# Altium PCB Sensor_Board_PCB.PcbDoc
Units mil, origin at the board's own origin, x right, y up, seen from the top; angles counter-clockwise.
Board outline 1655 x 2110 mil, 2 copper layers (Top Layer, Bottom Layer); 25 components, 22 nets, 124 pads, 20 vias.
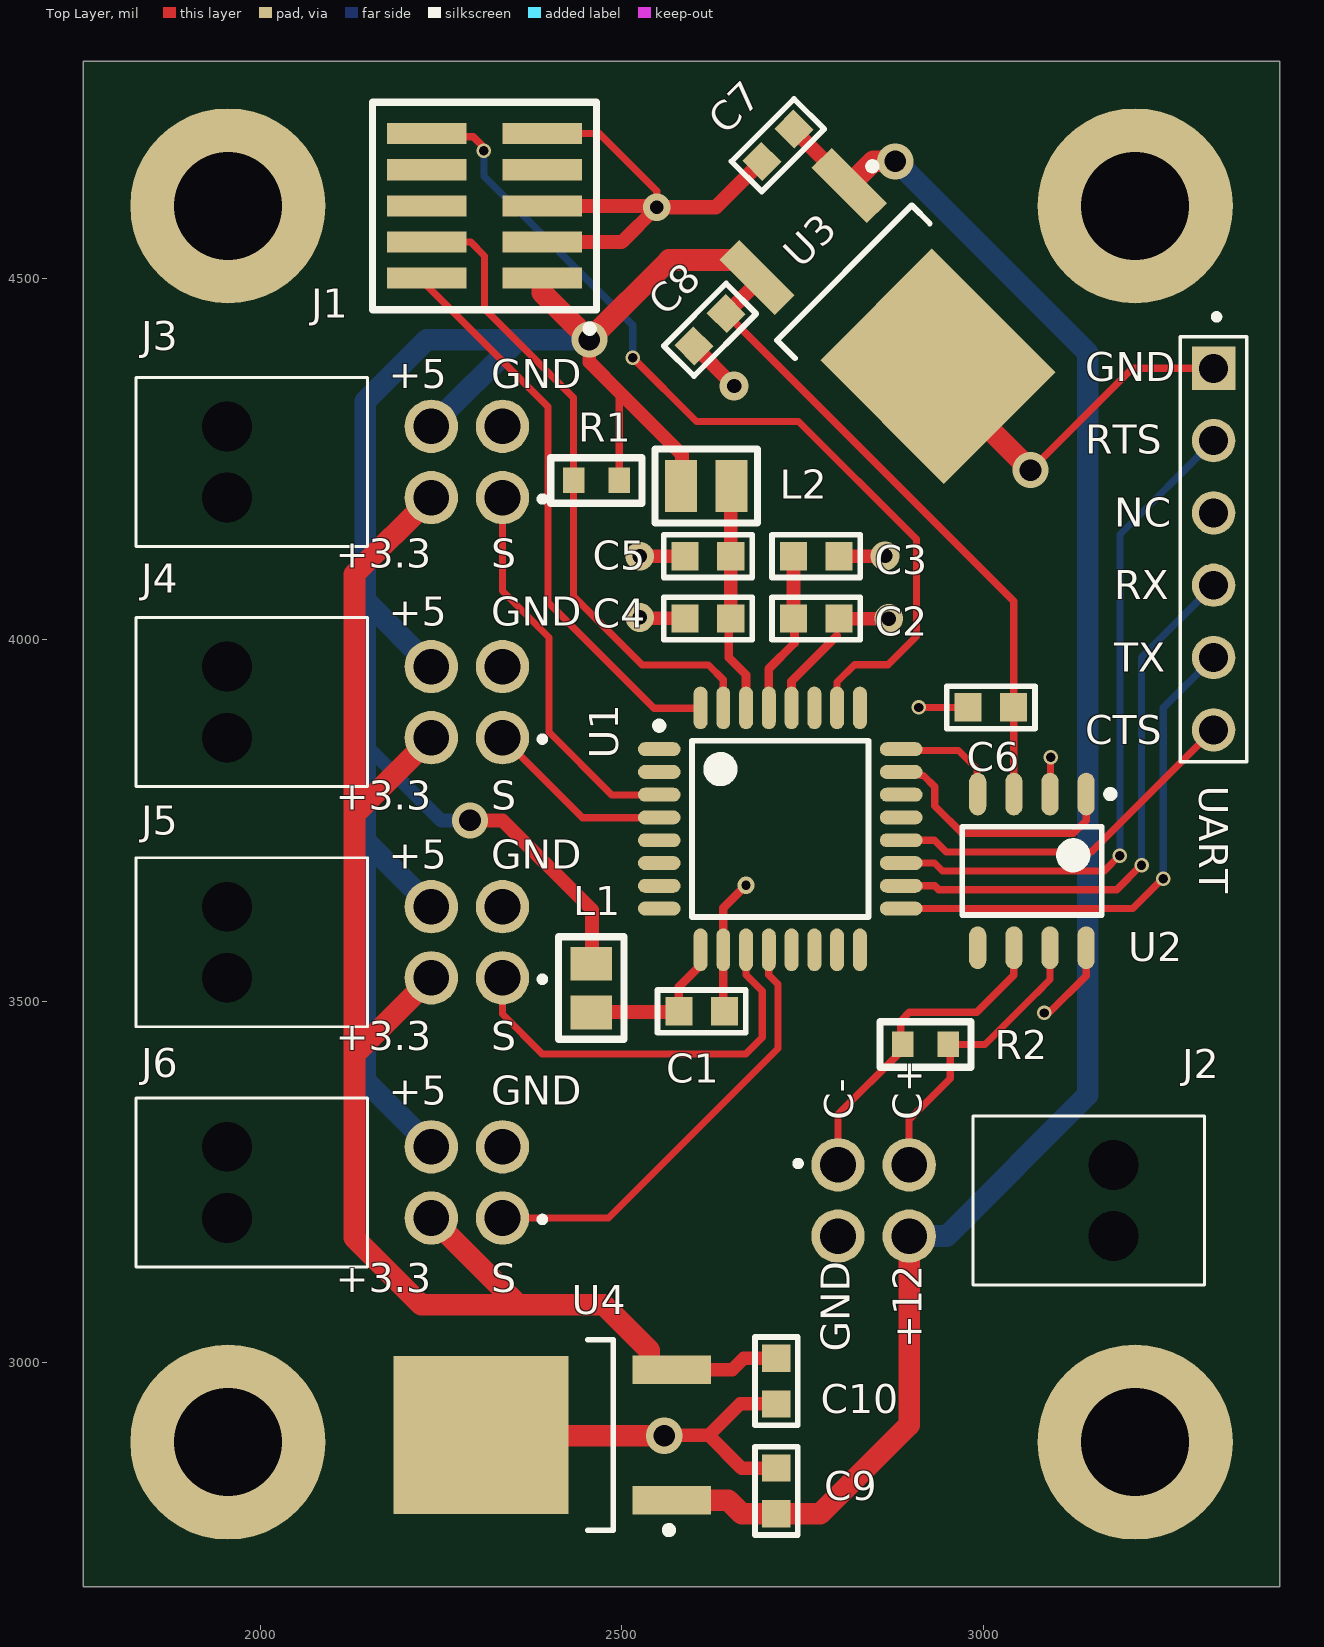
[diagram p0: Top Layer view]
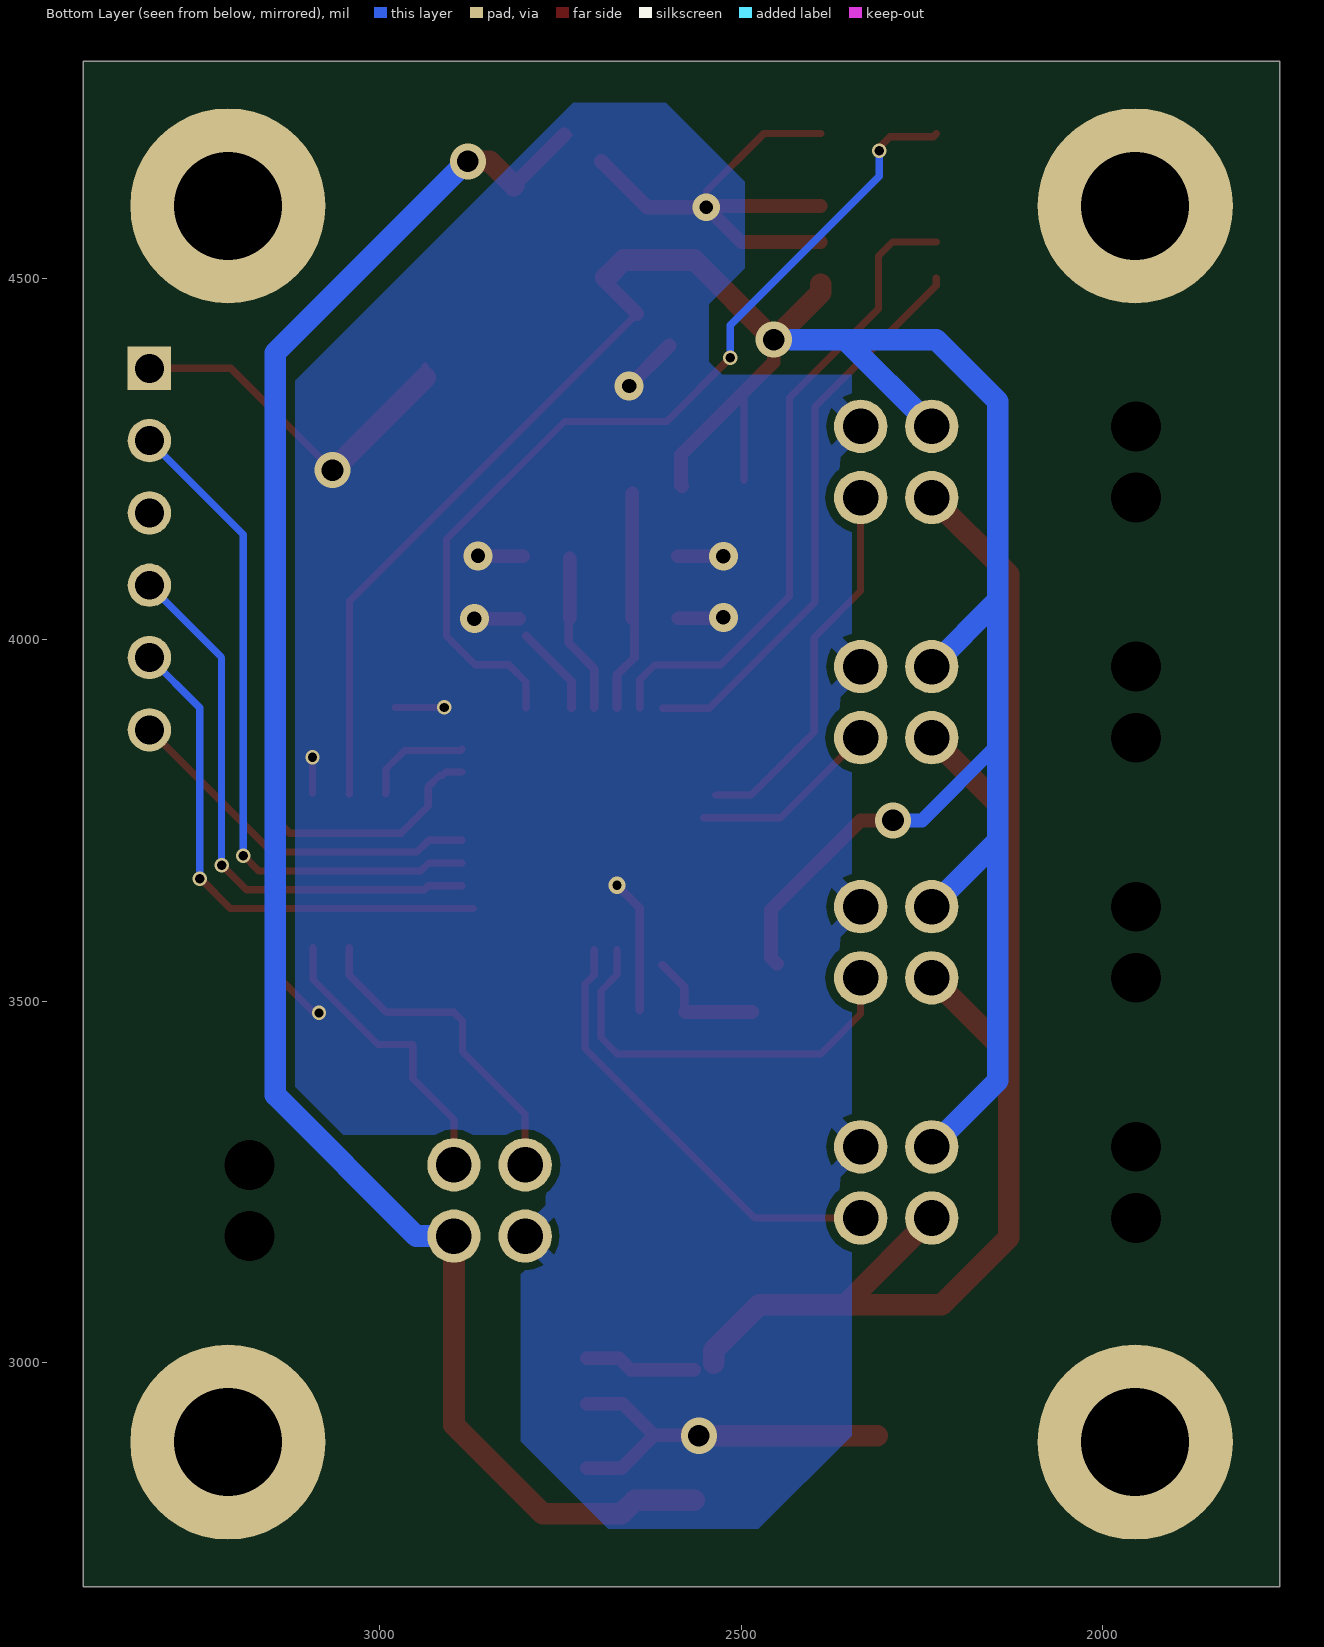
[diagram p1: Bottom Layer view, seen from below]

## Layer stack, top to bottom
Top Solder: solder mask 0.4, Solder Resist, Dk 3.5
Top Layer: signal copper 1.4
Dielectric 1: dielectric 12.6, FR-4, Dk 4.8
Bottom Layer: signal copper 1.4
Bottom Solder: solder mask 0.4, Solder Resist, Dk 3.5

## Board outline
1755,4800 3410,4800 3410,2690 1755,2690

## Design rules (kind name [scope] priority, off if disabled: settings)
Clearance [All] p1: gap=12 ignorepadtopadclearanceinfootprint=FALSE
MinimumSolderMaskSliver [All] p1: minsoldermaskwidth=6
PlaneClearance [All] p1: clearance=30
PlaneConnect [All] p1: pad.planeconnectstyle=Relief pad.reliefexpansion=20 pad.reliefentries=4 pad.reliefconductorwidth=10 pad.reliefairgap=10 via.planeconnectstyle=Direct via.reliefexpansion=20 via.reliefentries=4 via.reliefconductorwidth=10 via.reliefairgap=10
PolygonConnect PolygonConnect_Via [All vs IsVia] p1: connectstyle=Direct reliefconductorwidth=10 reliefentries=4 polygonreliefangle="90 Angle" airgapwidth=10
PolygonConnect [All] p2: connectstyle=Relief reliefconductorwidth=20 reliefentries=4 polygonreliefangle="45 Angle" airgapwidth=10
RoomDefinition Sensor_Board_Schematic [InComponentClass('Sensor_Board_Schematic')] p1: confinementstyle=ConfineIn formatcopy=TRUE lockcomponents=FALSE outline 1755,2690 3410,2690 3410,4800 1755,4800
RoutingVias [All] p1: holewidth=13 width=20 viastyle="Through Hole" minholewidth=13 minwidth=20 maxholewidth=30 maxwidth=50
SilkToSolderMaskClearance [IsPad] p1: minsilkscreentomaskgap=5.9 clearancetoexposedcopper=TRUE
SolderMaskExpansion [All] p1: expansion=2.95
Width [All] p1: maxlimit=50 minlimit=10 preferedwidth=10 minimp=50.000000 maximp=50.000000 favimp=50.000000
26 further rules are at their usual default settings.

## Components (designator, comment, footprint, x,y, rotation, side; value= is the part's Value field where it differs from the comment)
C1 "Cap" CAPC1608X08N 2610.27,3485.95 r180 top value=10uF
C2 "Cap" CAPC1608X08N 2768.74,4029.3 r180 top value=100nF
C3 "Cap" CAPC1608X08N 2768.74,4115.4 r180 top value=1uF
C4 "Cap" CAPC1608X08N 2619.09,4029.3 r0 top value=100nF
C5 "Cap" CAPC1608X08N 2619.09,4115.4 r0 top value=10uF
C6 "Cap" CAPC1608X08N 3010.4,3906.2 r180 top value=100nF
C7 "Cap" CAPC1608X08N 2715.77,4683.93 r225 top value=.33uF
C8 "Cap" CAPC1608X08N 2621.93,4428.63 r225 top value=100nF
C9 "Cap" CAPC1608X08N 2713.58,2822.36 r270 top value=.33uF
C10 "Cap" CAPC1608X08N 2713.58,2974.45 r90 top value=100nF
J1 "FTSH-105-01-L-DV-007-K" FTSH-105-01-L-DV-007-K 2309.92,4600 r90 top
J2 "NanoFit4" 1053141304 2798.9,3273.43 r90 top
J3 "NanoFit4" 1053141304 2334.8,4196.57 r270 top
J4 "NanoFit4" 1053141304 2334.8,3864.38 r270 top
J5 "NanoFit4" 1053141304 2334.8,3532.19 r270 top
J6 "NanoFit4" 1053141304 2334.8,3200 r270 top
L1 "Ferrite Bead" INDC2012X11N 2457.7,3518.04 r90 top value=10mH
L2 "Inductor" INDC2016X18N 2616.7,4212.5 r180 top value=10uH
R1 "Res1" RESC1608X06N 2464.7,4220.3 r0 top value=1K
R2 "Res1" RESC1608X06N 2920,3440.1 r0 top value=120
U1 "ATSAMC21E18A-AUT" TQFP80P900X900X120-32N 2718.97,3738.27 r0 top
U2 "ATA6561" SOIC127P600X175-8N 3067.2,3680.1 r270 top
U3 "UA78M05CKVURG3" DPAK229P991X252-3N 2867.6,4447.7 r315 top
U4 "UA78M33CKVURG3" DPAK229P991X252-3N 2403.58,2899.84 r180 top
UART "3-644456-6" *TE_3-644456-6 3318.6,4125.3 r90 top (schematic designator J7)

## Footprints (in the part's own frame and the unit in brackets; to place one, negate y for a bottom-side part, rotate by r counter-clockwise, add the part's x,y. Pads: shape width x height; smd on the part's side, far side on the other; paste and mask are expansions set on the pad)
1053141304 [mm]
  round 1.875 hole 1.25: 1(0,0) 2(-2.5,0) 3(0,-2.5) 4(-2.5,-2.5)
  round 0.875 hole 1.75: 5(-2.5,-9.68) 6(0,-9.68)
  silkscreen extent -4.22,-12.88 1.72,1.5, body extent -4.24,-14.33 1.7,0.33, height 9.35
*TE_3-644456-6 [mil]
  rect 60x60 hole 40: 1(250,0)
  round 60 hole 40: 2(150,0) 3(50,0) 4(-50,0) 5(-150,0) 6(-250,0)
  silkscreen extent -294,-46 325,46, body extent -293,-48 295,177, height 395
CAPC1608X08N [mm] "Chip Capacitor, 2-Leads, Body 1.60x0.80mm, IPC Medium Density"
  rect 0.95x1 smd: 1(-0.8,0) 2(0.8,0)
  silkscreen extent -1.55,-0.75 1.55,0.75, body extent -0.87,-0.48 0.87,0.47, height 0.8
DPAK229P991X252-3N [mm] "D-PAK, 3-Pads, Body 6.21x6.71mm (max), IPC Medium Density"
  rect 2.75x1 smd: 1(-4.2,2.29) 3(-4.2,-2.29)
  rect 6.15x5.55 smd: 4(2.5,0)
  silkscreen extent -4.22,-3.35 -1.25,3.46, body extent -2.15,-3.35 4.07,3.35, height 2.52
FTSH-105-01-L-DV-007-K [mm]
  rect 0.74x2.8 smd paste-0.076 mask+0.085: 1(-2.54,-2.03)
  rect 0.74x2.8 smd paste-0.076 mask+0.076: 2(-2.54,2.03) 3(-1.27,-2.03) 4(-1.27,2.03) 5(0,-2.03) 6(0,2.03) 7(1.27,-2.03) 8(1.27,2.03) 9(2.54,-2.03) 10(2.54,2.03)
  silkscreen extent -4.44,-3.94 3.64,3.94, body extent -3.17,-2.92 3.17,2.92, height 6.11
INDC2012X11N [mm] "Chip Inductor, 2-Leads, Body 2.00x1.25mm, IPC Medium Density"
  rect 1.19x1.47 smd: 1(-0.855,0) 2(0.855,0)
  silkscreen extent -1.8,-1.15 1.8,1.15, body extent -1.1,-0.72 1.1,0.72, height 1.1
INDC2016X18N [mm] "Chip Inductor, 2-Leads, Body 2.00x1.60mm, IPC Medium Density"
  rect 1.13x1.82 smd: 1(-0.885,0) 2(0.885,0)
  silkscreen extent -1.8,-1.3 1.8,1.3, body extent -1.1,-0.9 1.1,0.9, height 1.8
RESC1608X06N [mm] "Chip Resistor, 2-Leads, Body 1.60x0.80mm, IPC Medium Density"
  rect 0.75x0.9 smd: 1(-0.8,0) 2(0.8,0)
  silkscreen extent -1.6,-0.8 1.6,0.8, body extent -0.85,-0.45 0.85,0.45, height 0.55
SOIC127P600X175-8N [mm] "SOIC, 8-Leads, Body 4.90x3.90mm, Pitch 1.27mm, IPC Medium Density"
  oval 1.5x0.6 smd: 1(-2.7,1.905) 2(-2.7,0.635) 3(-2.7,-0.635) 4(-2.7,-1.905) 5(2.7,-1.905) 6(2.7,-0.635) 7(2.7,0.635) 8(2.7,1.905)
  silkscreen extent -2.82,-2.45 1.55,2.88, body extent -1.95,-2.45 1.95,2.45, height 1.75
TQFP80P900X900X120-32N [mm] "TQFP, 32-Leads, Body 7.00x7.00mm, Pitch 0.80mm, IPC Medium Density"
  oval 1.5x0.49 smd mask+0.075: 1(-4.25,2.8) 2(-4.25,2) 3(-4.25,1.2) 4(-4.25,0.4) 5(-4.25,-0.4) 6(-4.25,-1.2) 7(-4.25,-2) 8(-4.25,-2.8) 17(4.25,-2.8) 18(4.25,-2) 19(4.25,-1.2) 20(4.25,-0.4) 21(4.25,0.4) 22(4.25,1.2) 23(4.25,2) 24(4.25,2.8)
  oval 0.49x1.5 smd mask+0.075: 9(-2.8,-4.25) 10(-2,-4.25) 11(-1.2,-4.25) 12(-0.4,-4.25) 13(0.4,-4.25) 14(1.2,-4.25) 15(2,-4.25) 16(2.8,-4.25) 25(2.8,4.25) 26(2,4.25) 27(1.2,4.25) 28(0.4,4.25) 29(-0.4,4.25) 30(-1.2,4.25) 31(-2,4.25) 32(-2.8,4.25)
  silkscreen extent -4.37,-3.1 3.1,3.75, body extent -3.5,-3.5 3.5,3.5, height 1.2

## Part data
C1 C2 C3 C4 C5 C6 C7 C8 C9 C10: "Capacitor", LatestRevisionDate=17-Jul-2002, LatestRevisionNote="Re-released for DXP Platform.", PackageDescription="Radial Cap, Thru-Hole; 2 Leads; 0.3 in Pin Spacing", PackageReference=RAD-0.3, Published=8-Jun-2000, Publisher="Altium Limited"
L1: library part Inductor, "Inductor", Code_IEC=1005, Code_JEITA=0402, LatestRevisionDate=29-May-2009, LatestRevisionNote="IPC-7351 Footprint Added.", PackageDescription="Chip Inductor", PackageReference=0402-A, Published=8-Jun-2000, Publisher="Altium Limited"
R1 R2: "Resistor", LatestRevisionDate=17-Jul-2002, LatestRevisionNote="Re-released for DXP Platform.", PackageDescription="Axial Device, Thru-Hole; 2 Leads; 0.3 in Pin Spacing", PackageReference=AXIAL-0.3, Published=8-Jun-2000, Publisher="Altium Limited"
L2: Code_IEC=1005, Code_JEITA=0402, LatestRevisionDate=29-May-2009, LatestRevisionNote="IPC-7351 Footprint Added.", PackageDescription="Chip Inductor", PackageReference=0402-A, Published=8-Jun-2000, Publisher="Altium Limited"

## Free pads (board coordinates)
  round 270 hole 149.5 unplated: ""(1955,2890) ""(1955,4600) ""(3210,2890) ""(3210,4600)

## Via types
v1: diameter 20, hole 13, Top Layer to Bottom Layer, tented both sides, 8 vias
v2: diameter 50, hole 30, Top Layer to Bottom Layer, tented both sides, 5 vias
v3: diameter 40, hole 20, Top Layer to Bottom Layer, tented both sides, 5 vias
v4: diameter 38, hole 19, Top Layer to Bottom Layer, tented both sides, 1 vias
v5: diameter 24, hole 13, Top Layer to Bottom Layer, tented both sides, 1 vias

## Nets (pads, with @x,y where several pads share a name; then routed paths per layer and width w, separated by ;. In a path a pad name is that pad's centre, name@x,y a point inside that pad or via, vN(x,y) a via of type N, cw(c..) or ccw(c..) an arc to the next point about the centre after c; other vN are vias at no path point)
+3.3V: C10.2 J3.3 J4.3 J5.3 J6.3 U4.3 | length 2183.1
  Top Layer w19: U4.3@2565,2990 U4.3 2652.68,2990 2668.62,3005.94 C10.2
  Top Layer w30: J6.3 2356.38,3080 ; J5.3 2130,3425.81 ; J4.3 2131.99,3760 2130,3760 ; J3.3 2130,4090.2 2130,3760 ; U4.3@2537.8,2999.3 2537.8,3017.2 2475,3080 2356.38,3080 ; 2130,3425.81 2130,3172.6 2222.6,3080 2356.38,3080 ; 2130,3425.81 2130,3760
+5: C6.1 C8.1 J1.1 J3.4 J4.4 J5.4 J6.4 L1.2 L2.2 R1.2 U2.3 U3.3 | length 3944.8
  Top Layer w10: R1.2 2496.2,4338.1 2498.5,4340.4 ; C8.1 3041.9,4053.2 C6.1 3041.9,3786.7 U2.3 ; U3.3@2686.93,4493.63 U3.3
  Top Layer w19: v2(2290,3750) 2335,3750 2458.6,3626.4 2458.6,3559.9 L1.2@2450.4,3551.7 ; v2(2455,4415) 2455,4383.9 2498.5,4340.4 2583.1,4255.8 2583.1,4213.74 L2.2
  Top Layer w20: C8.1 U3.3@2686.93,4493.63
  Top Layer w30: J1.1@2389.84,4491.5 2389.84,4480.16 v2@2437.58,4432.42 ; v2(2455,4415) 2565.2,4525.2 2662.6,4525.2 U3.3
  Bottom Layer w19: 2145,3855 2250,3750 v2(2290,3750)
  Bottom Layer w30: J6.4 2145,3389.8 2145,3721.99 ; J5.4 2145,3721.99 ; J4.4 2145,4054.19 ; J3.4 2356.38,4415 ; v2@2430,4415 2356.38,4415 ; 2145,3721.99 2145,3855 2145,4054.19 ; 2145,4054.19 2145,4330 2230,4415 2356.38,4415
+12: C7.1 C9.2 J2.4 U3.1 U4.1 | length 2569.6
  Top Layer w10: C7.1@2738.04,4698.24 C7.1@2744.56,4698.24 ; v2(2878.09,4661.69) v2@2881.2,4664.8
  Top Layer w20: C7.1@2744.56,4698.24 U3.1
  Top Layer w30: U4.1@2565,2809.68 U4.1 2646.89,2809.68 2665.67,2790.91 2774.49,2790.91 2897.32,2913.74 J2.4 ; U3.1 2847.75,4661.69 v2(2878.09,4661.69)
  Bottom Layer w30: v2@2878.9,4662.5 3144.4,4397 3144.4,3370.2 2949.2,3175 J2.4
AIN0: J3.1 U1.3 | length 523.8
  Top Layer w10: J3.1 2334.8,4067.3 2399,4003.1 2399,3872.1 2485.98,3785.12 U1.3@2535.7,3785.12
AIN1: J4.1 U1.4 | length 280
  Top Layer w10: J4.1@2352.07,3864.38 J4.1 2445.56,3753.62 U1.4@2551.65,3753.62
AIN10: J5.1 U1.11 | length 582.2
  Top Layer w10: J5.1 2334.8,3482.04 2389.84,3427 2671.3,3427 2694,3449.7 2694,3514.1 2671.81,3536.29 2671.81,3570.87 U1.11
  Top Layer w30: J5.1@2334.8,3540 J5.1@2345,3540
AIN11: J6.1 U1.12 | length 620
  Top Layer w10: J6.1 2481.4,3200 2716,3434.6 2716,3523.21 2703.23,3535.99 U1.12
CANH: J2.3 R2.2 U2.7 | length 409.4
  Top Layer w10: J2.3 2897.32,3336.12 2954.25,3393.05 2954.25,3439.9 3002.3,3439.9 3057,3494.6 3057,3494.78 3072.82,3510.6 3073,3510.6 3092.2,3529.8 U2.7
CANL: J2.1 R2.1 U2.6 | length 455.7
  Top Layer w10: J2.1 2798.9,3343.43 2885.6,3430.13 2885.6,3472.5 2897.6,3484.5 2990.8,3484.5 3042.2,3535.9 U2.6
CANRX: U1.24 U2.4 | length 151.3
  Top Layer w10: U1.24 2888.07,3846.73 2965.47,3846.73 2991.18,3821.02 2991.18,3787.41 U2.4
CANTX: U1.23 U2.1 | length 350.6
  Top Layer w10: U1.23 2908.69,3817.01 2913.54,3812.16 2916.68,3812.16 2917.22,3812.16 2932.82,3796.55 2932.82,3769.98 2970.7,3732.1 3124.6,3732.1 3142.2,3749.7 U2.1
GND: C1.1 C2.1 C3.1 C4.1 C5.1 C6.2 C7.2 C8.2 C9.1 C10.1 J1.3 J1.5 J1.9 J2.2 J3.2 J4.2 J5.2 J6.2 U1.10 U1.28 U2.2 U2.8 U3.4 U4.4 UART.1 | length 2668.7
  Top Layer w10: J1.9 2468.9,4700 2548.14,4620.76 2548.14,4600 v4(2548.14,4598.21) ; v3@2655.1,4343.9 v3(2655.1,4350.92) ; v1(2910.7,3906.2) C6.2 ; U3.4@2937.2,4362.6 U3.4 ; v2(3065.3,4234.5) 3206.2,4375.4 3307.6,4375.4 UART.1@3317.5,4385.3 ; v1(3084,3483.6) 3090.6,3483.6 3142.2,3535.2 U2.8 ; U2.2@3093,3787.2 v1(3093,3837.5)
  Top Layer w12: C1.1@2640.23,3487.37 U1.10 2640.23,3628.9 v5(2671.73,3660.4) ; U1.28 2734.72,3942.49 2797.28,4005.05
  Top Layer w19: J1.3 2499.92,4550 v4(2548.14,4598.21) ; J1.5 v4@2548.14,4600 ; v3@2524.14,4029.6 C4.1@2587.1,4029.6 ; v3(2524.64,4115.4) C5.1 ; v2@2559.13,2899.37 2620.16,2899.37 ; C9.1 2665.67,2853.86 2620.16,2899.37 ; C10.1 2663.74,2942.95 2620.16,2899.37 ; C3.1@2801.85,4115.5 v3@2864.8,4115.5 ; C2.1@2806.94,4028.9 v3@2869.9,4028.9
  Top Layer w20: v4(2548.14,4598.21) 2630.06,4598.21 C7.2 ; C8.2 v3(2655.1,4350.92)
  Top Layer w30: U4.4@2312.09,2898.82 v2(2558.58,2898.82) ; U3.4@2937.2,4362.6 v2(3065.3,4234.5)
  Bottom Layer w30: J5.2 2326.99,3630.62 J5.2@2334.8,3638.43
  other v3: 2869.14,4029.2 2524.64,4030.9 2864.05,4115.8
NetC1_2: C1.2 L1.1 U1.9 | length 167
  Top Layer w12: C1.2@2578.78,3487.8 2578.78,3519.53 U1.9@2608.74,3549.49
  Top Layer w19: L1.1@2484.6,3485 C1.2@2577.5,3485
SWCLK: J1.4 R1.1 U1.31 | length 903.7
  Top Layer w10: J1.4 2290.8,4550 2310,4530.8 2310,4457.9 2433.1,4334.8 2433.1,4060.1 2528.2,3965 2619.93,3965 2640.23,3944.7 U1.31
SWDIO: J1.2 U1.32 | length 789.6
  Top Layer w10: J1.2 2230,4490 2397.8,4322.2 2397.8,4051.7 2544.3,3905.2 2608.34,3905.2 U1.32
UART-CTS: U1.20 UART.6 | length 522.2
  Top Layer w10: U1.20 2932.28,3722.53 2948.7,3706.11 3149.3,3706.11 UART.6@3327.75,3884.55
UART-RTS: U1.19 UART.2 | length 943.6
  Top Layer w10: U1.19 2932.46,3691.03 2943.37,3680.12 3167.21,3680.12 v1@3188.5,3701.4
  Bottom Layer w10: v1(3188.9,3701) 3188.9,4145.6 UART.2
UART-RX: U1.18 UART.4 | length 777.3
  Top Layer w10: U1.18 2932.84,3659.53 2938.25,3654.13 3184.43,3654.13 v1@3218.55,3688.25
  Bottom Layer w10: v1(3218.8,3688) 3218.8,3975.5 UART.4
UART-TX: U1.17 UART.5 | length 729.8
  Top Layer w10: U1.17@2870.7,3628.14 3206.64,3628.14 v1@3248.45,3669.95
  Bottom Layer w10: v1(3249,3669.4) 3249,3905.7 UART.5
VDDCORE: C2.2 C3.2 U1.29 | length 220
  Top Layer w12: U1.29 2703.23,3959.93 2738.7,3995.4 C2.2@2738.7,4027.8
  Top Layer w19: C2.2 C3.2@2737.24,4112.45
VDDIN: C4.2 C5.2 L2.1 U1.30 | length 304
  Top Layer w12: C4.2@2647.64,4026.34 2647.64,3975.4 2671.73,3951.31 U1.30
  Top Layer w19: C4.2 C5.2 L2.1@2650.59,4202.53
~RESET: J1.10 U1.26 | length 1267.6
  Top Layer w10: J1.10 2234.26,4695.74 2294.26,4695.74 2311.5,4678.5 v1(2309.1,4676.1) ; v1(2515,4390) 2603.1,4301.9 2744.4,4301.9 2907.47,4138.83 2907.47,4004.57 2868.1,3965.2 2821.6,3965.2 2797.71,3941.31 U1.26
  Bottom Layer w10: v1(2309.1,4676.1) 2309.1,4640.9 2515,4435 v1(2515,4390)
pads on no net: J1.6 J1.7 J1.8 J2.5 J2.6 J3.5 J3.6 J4.5 J4.6 J5.5 J5.6 J6.5 J6.6 U1.1 U1.2 U1.5 U1.6 U1.7 U1.8 U1.13 U1.14 U1.15 U1.16 U1.21 U1.22 U1.25 U1.27 U2.5 UART.3

## Polygon pours and split planes (outlines as drawn)
no net on Top Layer "Top Layer-No Net" (solid, pour order 10): 3195,4480
GND on Top Overlay (solid): 11510,3360
GND on Bottom Layer "Bottom Layer-GND" (solid, pour order 14): 3140.54,3924.46 3140.54,4334.76 2732.6,4742.7 2604.04,4742.7 2495,4633.66 2495,4513.9 2545.02,4463.88 2544.94,4384.74 2526.4,4366.2 2347.14,4366.2 2347.14,2898.96 2476.1,2770 2683.7,2770 2805,2891.3 2805,3315 3084.6,3315 3140.46,3370.86

## Silkscreen, mask and mechanical layers (free items; w line width, h text height)
Top Overlay:
  text "GND" at 3141.2,4357.4 h40
  text "+5" at 2177.21,4347.7 h40
  text "GND" at 2319.3,4347.7 h40
  text "RTS" at 3141.2,4256.92 h40
  text "NC" at 3181.19,4156.44 h40
  text "+3.3" at 2103.9,4099.5 h40
  text "S" at 2319.3,4099.5 h40
  text "RX" at 3181.19,4055.96 h40
  text "+5" at 2177.21,4019 h40
  text "GND" at 2319.3,4019 h40
  text "TX" at 3181.19,3955.48 h40
  text "CTS" at 3141.2,3855 h40
  text "+3.3" at 2103.9,3764.6 h40
  text "S" at 2319.3,3764.6 h40
  text "+5" at 2177.21,3683.1 h40
  text "GND" at 2319.3,3683.1 h40
  text "+3.3" at 2103.9,3432.3 h40
  text "S" at 2319.3,3432.3 h40
  text "+5" at 2177.21,3356.3 h40
  text "GND" at 2319.3,3356.3 h40
  text "C-" at 2820,3335 h40 r90
  text "C+" at 2915,3335 h40 r90
  text "+3.3" at 2103.9,3097.3 h40
  text "S" at 2319.3,3097.3 h40
  text "+12" at 2915,3020 h40 r90
  text "GND" at 2815,3015 h40 r90